# EAGLE board CT_schematic (EAGLE 7.6.0)

Size 100 x 80 mm. Coordinates in mm from the lower left corner, seen from the top.
Outline: 0,0 100,0 100,80 0,80 0,0
Copper layers (1*16): Top 0.035mm / dielectric 1.5mm / Bottom 0.035mm
Design rules "default": minimum track width 10mil, minimum drill 24mil, track to track 8mil, track to pad 8mil, pad to pad 8mil, via to via 8mil, smd to smd 8mil, copper to edge 40mil, drill to drill 8mil, minimum pad ring 10mil, minimum via ring 8mil, stop-mask expansion 4mil, vias tented up to drill 0mil, thermal gap 10mil

## Footprints (pad centres in the part's own frame; a part is rotated, then mirrored left to right if it is on the bottom)
C0603 = smd 0.8 x 0.8: 1 -0.762,0; 2 0.762,0
C0402 = smd 0.5 x 0.5: 1 -0.508,0; 2 0.508,0
C1210 = smd 1.2 x 2.5: 1 -1.524,0; 2 1.524,0
C0805 = smd 1.2 x 1.3: 1 -1.016,0; 2 1.016,0
C1206 = smd 1.3 x 1.6: 1 -1.524,0; 2 1.524,0
EXV-9H = smd 3.505 x 1.676: 1 -2.857,0; 2 2.857,0
L0603 = smd 0.8 x 0.8: 1 -0.762,0; 2 0.762,0
PJ-037B_PACKAGE = drill 3.7 square: 1 12,0 | drill 3.2 square: 2 6,0
R0603 = smd 0.8 x 0.8: 1 -0.762,0; 2 0.762,0
LQFP100 = smd 0.3 x 1.2: 1 -6,-7.75; 2 -5.5,-7.75; 3 -5,-7.75; 4 -4.5,-7.75; 5 -4,-7.75; 6 -3.5,-7.75; 7 -3,-7.75; 8 -2.5,-7.75; 9 -2,-7.75; 10 -1.5,-7.75; 11 -1,-7.75; 12 -0.5,-7.75; 13 0,-7.75; 14 0.5,-7.75; 15 1,-7.75; 16 1.5,-7.75; 17 2,-7.75; 18 2.5,-7.75; 19 3,-7.75; 20 3.5,-7.75; 21 4,-7.75; 22 4.5,-7.75; 23 5,-7.75; 24 5.5,-7.75; 25 6,-7.75; 51 6,7.75; 52 5.5,7.75; 53 5,7.75; 54 4.5,7.75; 55 4,7.75; 56 3.5,7.75; 57 3,7.75; 58 2.5,7.75; 59 2,7.75; 60 1.5,7.75; 61 1,7.75; 62 0.5,7.75; 63 0,7.75; 64 -0.5,7.75; 65 -1,7.75; 66 -1.5,7.75; 67 -2,7.75; 68 -2.5,7.75; 69 -3,7.75; 70 -3.5,7.75; 71 -4,7.75; 72 -4.5,7.75; 73 -5,7.75; 74 -5.5,7.75; 75 -6,7.75 | smd 1.2 x 0.3: 26 7.75,-6; 27 7.75,-5.5; 28 7.75,-5; 29 7.75,-4.5; 30 7.75,-4; 31 7.75,-3.5; 32 7.75,-3; 33 7.75,-2.5; 34 7.75,-2; 35 7.75,-1.5; 36 7.75,-1; 37 7.75,-0.5; 38 7.75,0; 39 7.75,0.5; 40 7.75,1; 41 7.75,1.5; 42 7.75,2; 43 7.75,2.5; 44 7.75,3; 45 7.75,3.5; 46 7.75,4; 47 7.75,4.5; 48 7.75,5; 49 7.75,5.5; 50 7.75,6; 76 -7.75,6; 77 -7.75,5.5; 78 -7.75,5; 79 -7.75,4.5; 80 -7.75,4; 81 -7.75,3.5; 82 -7.75,3; 83 -7.75,2.5; 84 -7.75,2; 85 -7.75,1.5; 86 -7.75,1; 87 -7.75,0.5; 88 -7.75,0; 89 -7.75,-0.5; 90 -7.75,-1; 91 -7.75,-1.5; 92 -7.75,-2; 93 -7.75,-2.5; 94 -7.75,-3; 95 -7.75,-3.5; 96 -7.75,-4; 97 -7.75,-4.5; 98 -7.75,-5; 99 -7.75,-5.5; 100 -7.75,-6
LGA63S127P16X13_2050X1750X150 = smd 0.9 x 0.9: 1 -9.525,-8.05; 2 -8.255,-8.05; 3 -6.985,-8.05; 4 -5.715,-8.05; 5 -4.445,-8.05; 6 -3.175,-8.05; 7 -1.905,-8.05; 8 -0.635,-8.05; 9 0.635,-8.05; 10 1.905,-8.05; 11 3.175,-8.05; 12 4.445,-8.05; 13 5.715,-8.05; 14 6.985,-8.05; 15 8.255,-8.05; 16 9.525,-8.05; 17 9.525,-6.35; 18 9.525,-5.08; 19 9.525,-3.81; 20 9.525,-2.54; 21 9.525,-1.27; 22 9.525,0; 23 9.525,1.27; 24 9.525,2.54; 25 9.525,3.81; 26 9.525,5.08; 27 9.525,6.35; 28 9.525,8.05; 29 8.255,8.05; 30 6.985,8.05; 31 5.715,8.05; 32 4.445,8.05; 33 3.175,8.05; 34 1.905,8.05; 35 0.635,8.05; 36 -0.635,8.05; 37 -1.905,8.05; 38 -3.175,8.05; 39 -4.445,8.05; 40 -5.715,8.05; 41 -6.985,8.05; 42 -8.255,8.05; 43 -9.525,8.05; 44 -9.525,6.35; 45 -9.525,5.08; 46 -9.525,3.81; 47 -9.525,2.54; 48 -9.525,1.27; 49 -9.525,0; 50 -9.525,-1.27; 51 -9.525,-2.54; 52 -9.525,-3.81; 53 -9.525,-5.08; 54 -9.525,-6.35 | smd 2.2 x 2.2: 55 -4.5,-4.5; 56 -1.5,-4.5; 57 1.5,-4.5; 58 -4.5,-1.5; 59 -1.5,-1.5; 60 1.5,-1.5; 61 -4.5,1.5; 62 -1.5,1.5; 63 1.5,1.5
COAXIAL_C = smd 1 x 1: 1 0,-1.5; 2 0,1.5 | smd 1.05 x 2.2: 3 -1.475,0; 4 1.475,0
SAMTEC_FTSH-105-01-L-DV-K = smd 0.762 x 2.794: 1 -2.54,-2.032; 2 -2.54,2.032; 3 -1.27,-2.032; 4 -1.27,2.032; 5 0,-2.032; 6 0,2.032; 7 1.27,-2.032; 8 1.27,2.032; 9 2.54,-2.032; 10 2.54,2.032
TDFN-8/6MM = smd 0.3 x 0.75: 1 0,0; 2 0.5,0; 3 1,0; 4 1.5,0; 5 1.5,3; 6 1,3; 7 0.5,3; 8 0,3
QFN-28 = smd 0.813 x 0.305: 1 -2.451,1.5; 2 -2.451,1; 3 -2.451,0.5; 4 -2.451,0; 5 -2.451,-0.5; 6 -2.451,-1; 7 -2.451,-1.5; 15 2.451,-1.5; 16 2.451,-1; 17 2.451,-0.5; 18 2.451,0; 19 2.451,0.5; 20 2.451,1; 21 2.451,1.5 | smd 0.305 x 0.813: 8 -1.5,-2.451; 9 -1,-2.451; 10 -0.5,-2.451; 11 0,-2.451; 12 0.5,-2.451; 13 1,-2.451; 14 1.5,-2.451; 22 1.5,2.451; 23 1,2.451; 24 0.5,2.451; 25 0,2.451; 26 -0.5,2.451; 27 -1,2.451; 28 -1.5,2.451 | smd 3.607 x 3.607: 29 0,0
SJ-43515TS-SMT-TR = smd 2.2 x 3: 1 0.6,-7.4; 4 3.4,-7.4 | smd 3 x 3: 2 12.8,-7.4; 5 17,-3 | smd 2 x 3: 3 5.3,0; 6 2.5,0 | drill 1.8: P$7 4.5,-3.69; P$8 11.54,-3.69
ABS07-32.768KHZ-7-T = smd 1.1 x 2.4: 1 -2.5,0; 2 0,0
ABLS-25.000MHZ-B2F-T = smd 5.6 x 2.8: 1 -3.81,0; 2 5.69,0
ASFL1 = smd 1.7 x 1.5: 1 -1.27,-1.1; 2 1.27,-1.1; 3 1.27,1.1; 4 -1.27,1.1
WSON-8 = smd 0.3 x 0.6: 1 -0.75,0; 2 0.05,0; 3 0.85,0; 4 1.65,0; 5 1.65,3.8; 6 0.85,3.8; 7 0.05,3.8; 8 -0.75,3.8 | smd 3 x 2.6: PAD 0.45,1.9
SON-6 = smd 0.55 x 0.3: 1 -0.355,0.5 | smd 0.52 x 0.3: 2 -0.37,0; 3 -0.37,-0.5; 4 0.37,-0.5; 5 0.37,0; 6 0.37,0.5
SW_4-1437565-2 = smd 1.4 x 2.1: 1 -2.23,4.55; 2 -2.23,-4.55; 3 2.23,4.55; 4 2.23,-4.55
LGM67K-G1J2-24-Z = smd 0.8 x 1.4: A -2,0; C 0,0
NC7SZ125M5X = smd 1.3 x 0.7: 1 -1.3,0.95; 2 -1.3,0; 3 -1.3,-0.95; 4 1.3,-0.95; 5 1.3,0.95
DUMMY_PACKAGE_205 = drill 0.3: 1 0,-1; 2 1.5,-1; 3 3,-1

## Placement (x,y rotation side)
C1  1e-06  [C0603]  -50.8,85.09 0 top  (outside the outline)
C2  1e-07  [C0603]  -54.61,85.09 0 top  (outside the outline)
C3  1e-07  [C0603]  -58.42,85.09 0 top  (outside the outline)
C4  1e-07  [C0603]  -62.23,85.09 0 top  (outside the outline)
C5  1e-07  [C0603]  -66.04,85.09 0 top  (outside the outline)
C6  1e-07  [C0603]  -69.85,85.09 0 top  (outside the outline)
C7  1e-07  [C0603]  -73.66,85.09 0 top  (outside the outline)
C8  4.7e-06  [C0603]  -39.37,85.09 0 top  (outside the outline)
C9  2.2e-06  [C0603]  -43.18,85.09 0 top  (outside the outline)
C10  2.2e-06  [C0603]  -46.99,85.09 0 top  (outside the outline)
C11  1e-08  [C0603]  -77.47,85.09 0 top  (outside the outline)
C12  1e-06  [C0603]  -81.28,85.09 0 top  (outside the outline)
C13  1e-11  [C0402]  -69.85,90.17 0 top  (outside the outline)
C14  1e-11  [C0402]  -73.66,90.17 0 top  (outside the outline)
C15  1e-11  [C0402]  -77.47,90.17 0 top  (outside the outline)
C16  1e-11  [C0402]  -81.28,90.17 0 top  (outside the outline)
C17  1e-12  [C0402]  -85.09,90.17 0 top  (outside the outline)
C18  2.2e-05  [C1210]  -38.1,73.66 0 top  (outside the outline)
C19  1e-07  [C0402]  -15.24,95.25 0 top  (outside the outline)
C20  1e-07  [C0402]  -19.05,95.25 0 top  (outside the outline)
C21  1e-07  [C0402]  -22.86,95.25 0 top  (outside the outline)
C22  1e-08  [C0402]  -26.67,95.25 0 top  (outside the outline)
C23  2.2e-05  [C1210]  -44.45,73.66 0 top  (outside the outline)
C24  2.2e-05  [C1210]  -50.8,73.66 0 top  (outside the outline)
C25  1e-09  [C0402]  -30.48,95.25 0 top  (outside the outline)
C26  1e-09  [C0402]  -34.29,95.25 0 top  (outside the outline)
C27  1e-07  [C0402]  -38.1,95.25 0 top  (outside the outline)
C28  1e-07  [C0402]  -41.91,95.25 0 top  (outside the outline)
C29  1e-07  [C0402]  -45.72,95.25 0 top  (outside the outline)
C30  1e-07  [C0402]  -49.53,95.25 0 top  (outside the outline)
C31  1e-07  [C0402]  -53.34,95.25 0 top  (outside the outline)
C32  1e-05  [C0805]  -15.24,80.01 0 top  (outside the outline)
C33  1e-05  [C0805]  -20.32,80.01 0 top  (outside the outline)
C34  1e-05  [C0805]  -25.4,80.01 0 top  (outside the outline)
C35  1e-05  [C0805]  -30.48,80.01 0 top  (outside the outline)
C36  1e-05  [C0805]  -35.56,80.01 0 top  (outside the outline)
C37  1e-08  [C0402]  -57.15,95.25 0 top  (outside the outline)
C38  1e-08  [C0402]  -60.96,95.25 0 top  (outside the outline)
C39  1e-05  [C1206]  -63.5,72.39 0 top  (outside the outline)
C40  1e-05  [C1210]  -57.15,73.66 0 top  (outside the outline)
C41  1e-07  [C0402]  -64.77,95.25 0 top  (outside the outline)
C42  0.0001  [EXV-9H]  -17.78,66.04 0 top  (outside the outline)
C43  0.0001  [EXV-9H]  -29.21,66.04 0 top  (outside the outline)
C44  1e-08  [C0402]  -68.58,95.25 0 top  (outside the outline)
C45  1e-08  [C0402]  -72.39,95.25 0 top  (outside the outline)
C46  1e-08  [C0402]  -76.2,95.25 0 top  (outside the outline)
F1  240.0  [L0603]  -85.09,85.09 0 top  (outside the outline)
I1  3.6e-09  [C0402]  -66.04,90.17 0 top  (outside the outline)
J1  PJ-037B  [PJ-037B_PACKAGE]  -55.88,44.45 0 top  (outside the outline)
R2  1000.0  [R0603]  -15.24,90.17 0 top  (outside the outline)
R4  4700.0  [R0603]  -19.05,90.17 0 top  (outside the outline)
R5  4700.0  [R0603]  -22.86,90.17 0 top  (outside the outline)
R6  2200.0  [R0603]  -26.67,90.17 0 top  (outside the outline)
R7  2200.0  [R0603]  -30.48,90.17 0 top  (outside the outline)
R8  2200.0  [R0603]  -34.29,90.17 0 top  (outside the outline)
R9  2200.0  [R0603]  -38.1,90.17 0 top  (outside the outline)
R10  10000.0  [R0603]  -60.96,80.01 0 top  (outside the outline)
R11  100000.0  [R0603]  -40.64,80.01 0 top  (outside the outline)
R12  2700.0  [R0603]  -41.91,90.17 0 top  (outside the outline)
R13  10000.0  [R0603]  -66.04,80.01 0 top  (outside the outline)
R14  10000.0  [R0603]  -71.12,80.01 0 top  (outside the outline)
R15  10000.0  [R0603]  -76.2,80.01 0 top  (outside the outline)
R16  10000.0  [R0603]  -81.28,80.01 0 top  (outside the outline)
R17  5.0  [R0603]  -45.72,90.17 0 top  (outside the outline)
R18  47000.0  [R0603]  -15.24,85.09 0 top  (outside the outline)
R19  47000.0  [R0603]  -20.32,85.09 0 top  (outside the outline)
R20  47000.0  [R0603]  -25.4,85.09 0 top  (outside the outline)
R21  680.0  [R0603]  -49.53,90.17 0 top  (outside the outline)
R22  100000.0  [R0603]  -45.72,80.01 0 top  (outside the outline)
R23  2231.0  [R0603]  -53.34,90.17 0 top  (outside the outline)
R24  1000.0  [R0603]  -57.15,90.17 0 top  (outside the outline)
R25  10000.0  [R0603]  -30.48,85.09 0 top  (outside the outline)
R26  10000.0  [R0603]  -35.56,85.09 0 top  (outside the outline)
R27  9100.0  [R0603]  -60.96,90.17 0 top  (outside the outline)
R28  680000.0  [R0603]  -50.8,80.01 0 top  (outside the outline)
R29  120000.0  [R0603]  -55.88,80.01 0 top  (outside the outline)
U1  STM32F411VET6  [LQFP100]  -49.53,8.89 0 top  (outside the outline)
U2  CC3200MODR1M2AMOBT  [LGA63S127P16X13_2050X1750X150]  -25.4,11.43 0 top  (outside the outline)
U3  73412-0114  [COAXIAL_C]  -76.2,55.88 0 top  (outside the outline)
U4  FTSH-105-01-L-DV-K  [SAMTEC_FTSH-105-01-L-DV-K]  -35.56,30.48 0 top  (outside the outline)
U5  24AA01T-I/MNY  [TDFN-8/6MM]  -24.13,55.88 0 top  (outside the outline)
U6  WM8731CLSEFL  [QFN-28]  -30.48,73.66 0 top  (outside the outline)
U7  SJ-43515TS-SMT-TR  [SJ-43515TS-SMT-TR]  -68.58,31.75 0 top  (outside the outline)
U8  SJ-43515TS-SMT-TR  [SJ-43515TS-SMT-TR]  -39.37,46.99 0 top  (outside the outline)
U9  ABS07-32.768KHZ-7-T  [ABS07-32.768KHZ-7-T]  -71.12,66.04 0 top  (outside the outline)
U10  ABLS-25.000MHZ-B2F-T  [ABLS-25.000MHZ-B2F-T]  -48.26,66.04 0 top  (outside the outline)
U11  ASFL1-12.288MHZ-EC-T  [ASFL1]  -64.77,57.15 0 top  (outside the outline)
U12  LP3878SDX-ADJ/NOPB  [WSON-8]  -44.45,54.61 0 top  (outside the outline)
U13  TPS3895ADRYR  [SON-6]  -13.97,99.06 0 top  (outside the outline)
U14  4-1437565-2  [SW_4-1437565-2]  -72.39,43.18 0 top  (outside the outline)
U15  Q65110A2395  [LGM67K-G1J2-24-Z]  -17.78,73.66 0 top  (outside the outline)
U16  nc7sz125m5x  [NC7SZ125M5X]  -68.58,72.39 0 top  (outside the outline)
U17  nc7sz125m5x  [NC7SZ125M5X]  -74.93,72.39 0 top  (outside the outline)
U18  nc7sz125m5x  [NC7SZ125M5X]  -81.28,72.39 0 top  (outside the outline)
U19  Dummy  [DUMMY_PACKAGE_205]  -82.55,95.25 0 top  (outside the outline)

## Library data of the parts
C1-C46 F1 I1 J1 R2 R4-R29 U1-U19 = circuit_tree

## Nets
CLK_CRYSTAL_U1_8: C13.1 U1.8 U9.1
CLK_CRYSTAL_U1_9: C14.1 U1.9 U9.2
CLK_CRYSTAL_U1_12: C15.1 U1.12 U10.1
CLK_CRYSTAL_U1_13: C16.1 U1.13 U10.2
CLK_U6_1: U6.1 U11.3
GND: C1.2 C2.2 C3.2 C4.2 C5.2 C6.2 C7.2 C8.2 C9.2 C10.2 C11.2 C12.2 C13.2 C14.2 C15.2 C16.2 C17.2 C18.2 C19.2 C20.2 C21.2 C22.2 C26.2 C27.2 C28.2 C29.2 C30.2 C31.2 C32.2 C33.2 C34.2 C35.2 C36.2 C37.2 C38.2 C39.2 C40.2 C41.2 C42.2 C43.2 C44.2 C45.2 C46.2 J1.2 R2.2 R10.2 R11.2 R12.2 R16.2 R17.2 R18.2 R19.2 R20.2 R24.2 R27.2 R29.2 U1.10 U1.20 U1.27 U1.49 U1.74 U1.99 U2.1 U2.2 U2.16 U2.27 U2.28 U2.30 U2.32 U2.38 U2.43 U2.55 U2.56 U2.57 U2.58 U2.59 U2.60 U2.61 U2.62 U2.63 U3.1 U3.2 U3.3 U3.4 U4.3 U4.5 U5.4 U5.7 U6.4 U6.15 U6.19 U6.25 U6.26 U6.29 U7.1 U8.1 U11.2 U12.3 U12.PAD U13.2 U15.C U16.2 U16.3 U17.1 U17.3 U18.1 U18.3 U19.1
NET_U1_14: R5.1 U1.14 U18.4
NET_U1_22: C11.1 C12.1 F1.1 U1.21 U1.22
NET_U1_47: R8.1 U1.47 U5.6
NET_U1_48: C9.1 U1.48
NET_U1_73: C10.1 U1.73
NET_U1_92: R6.1 U1.92 U2.3
NET_U1_93: R7.1 U1.93 U2.4
NET_U1_94: R10.1 U1.94
NET_U1_96: R9.1 U1.96 U5.5
NET_U1_97: U15.A
NET_U1_98: U14.3 U14.4
NET_U2_21: R11.1 U2.21
NET_U2_23: R12.1 U2.23
NET_U2_35: R4.1 U2.35 U17.4
NET_U3_1: C17.1 I1.1 U3.1
NET_U3_31: I1.2
NET_U4_9: R17.1 U4.9
NET_U6_9: U6.9
NET_U6_20: C31.1 C36.1 U6.20
NET_U7_2: C24.1 R19.1 U7.2
NET_U7_5: C23.1 R18.1 U7.5
NET_U7_13: C23.2
NET_U7_14: C24.2
NET_U8_5: C25.1 C26.1 R20.1 R21.1 U8.5
NET_U8_21: R21.2
NET_U8_22: C25.2
NET_U12_1: C38.1 U12.1
NET_U12_6: R23.2 R24.1 U12.6
NET_U12_8: R22.1 U12.8
NET_U13_1: R26.1 R27.1 U13.1
NET_U13_3: R28.2 R29.1 U13.3
NET_U13_4: R25.1 U13.4 U16.4 U17.2 U18.2
NET_U14_1: R2.1 U14.1 U14.2
PROC_ADC1_IN1: U1.24 U19.3
PROC_ADC1_IN2: U1.25 U19.2
PROC_I2S1_CK: U1.30 U6.7
PROC_I2S1_SD: U1.32 U6.8
PROC_I2S1_WS: U1.29 U6.9 U6.11
PROC_SYS_JTCK_SWCLK: R16.1 U1.76 U4.4
PROC_SYS_JTDI: R14.1 U1.77 U4.8
PROC_SYS_JTDO_SWO: U1.89 U4.6
PROC_SYS_JTMS_SWDIO: R15.1 U1.72 U4.2
RST_OUT_U4_JTAG_RST_B: R13.1 U4.10 U16.1
VCC_S1_5V4: C39.1 C42.1 C43.1 J1.1 R22.2 U12.4
VCC_TIER1_3V3: C1.1 C2.1 C3.1 C4.1 C5.1 C6.1 C7.1 C8.1 C18.1 C19.1 C20.1 C21.1 C22.1 C27.1 C28.1 C29.1 C30.1 C32.1 C33.1 C34.1 C35.1 C37.1 C40.1 C41.1 C44.1 C45.1 C46.1 F1.2 R4.2 R5.2 R6.2 R7.2 R8.2 R9.2 R13.2 R14.2 R15.2 R23.1 R25.2 R26.2 R28.1 U1.6 U1.11 U1.19 U1.28 U1.50 U1.75 U1.100 U2.36 U2.37 U2.40 U4.1 U5.8 U6.3 U6.5 U6.12 U6.18 U11.4 U12.5 U13.6 U16.5 U17.5 U18.5

## Tracks (layer width: path | path; a pad name or v marks a point on that pad's centre or on a via)
CLK_CRYSTAL_U1_8  (2 unrouted)
CLK_CRYSTAL_U1_9  (2 unrouted)
CLK_CRYSTAL_U1_12  (2 unrouted)
CLK_CRYSTAL_U1_13  (2 unrouted)
CLK_U6_1  (1 unrouted)
GND  (107 unrouted)
NET_U1_14  (2 unrouted)
NET_U1_22  (4 unrouted)
NET_U1_47  (2 unrouted)
NET_U1_48  (1 unrouted)
NET_U1_73  (1 unrouted)
NET_U1_92  (2 unrouted)
NET_U1_93  (2 unrouted)
NET_U1_94  (1 unrouted)
NET_U1_96  (2 unrouted)
NET_U1_98  (1 unrouted)
NET_U2_21  (1 unrouted)
NET_U2_23  (1 unrouted)
NET_U2_35  (2 unrouted)
NET_U3_1  (2 unrouted)
NET_U4_9  (1 unrouted)
NET_U6_20  (2 unrouted)
NET_U7_2  (2 unrouted)
NET_U7_5  (2 unrouted)
NET_U8_5  (4 unrouted)
NET_U12_1  (1 unrouted)
NET_U12_6  (2 unrouted)
NET_U12_8  (1 unrouted)
NET_U13_1  (2 unrouted)
NET_U13_3  (2 unrouted)
NET_U13_4  (4 unrouted)
NET_U14_1  (2 unrouted)
PROC_ADC1_IN1  (1 unrouted)
PROC_ADC1_IN2  (1 unrouted)
PROC_I2S1_CK  (1 unrouted)
PROC_I2S1_SD  (1 unrouted)
PROC_I2S1_WS  (2 unrouted)
PROC_SYS_JTCK_SWCLK  (2 unrouted)
PROC_SYS_JTDI  (2 unrouted)
PROC_SYS_JTDO_SWO  (1 unrouted)
PROC_SYS_JTMS_SWDIO  (2 unrouted)
RST_OUT_U4_JTAG_RST_B  (2 unrouted)
VCC_S1_5V4  (5 unrouted)
VCC_TIER1_3V3  (62 unrouted)